# Altium PCB МПСУ.464342.21-005 T5M.PcbDoc
Units mm, origin at the board's own origin, x right, y up, seen from the top; angles counter-clockwise.
Board outline 152.4 x 101.6 mm, 2 copper layers (Top Layer, Bottom Layer); 66 components, 50 nets, 238 pads, 0 vias.
Unrouted connection lines stored in the file: 182.
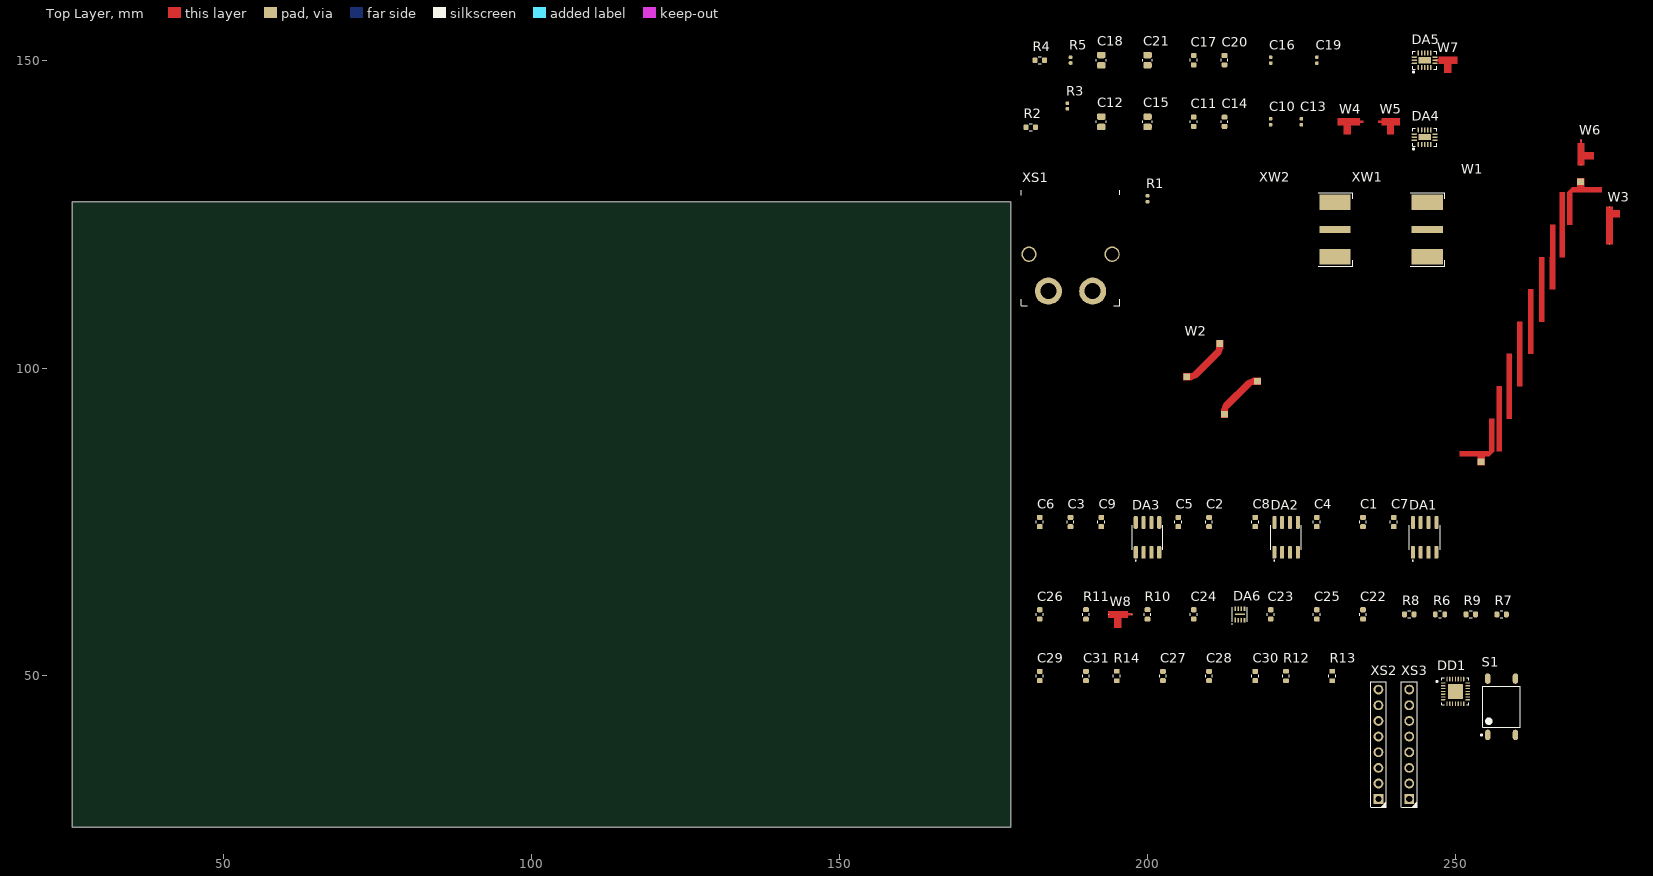
[diagram p0: Top Layer view]
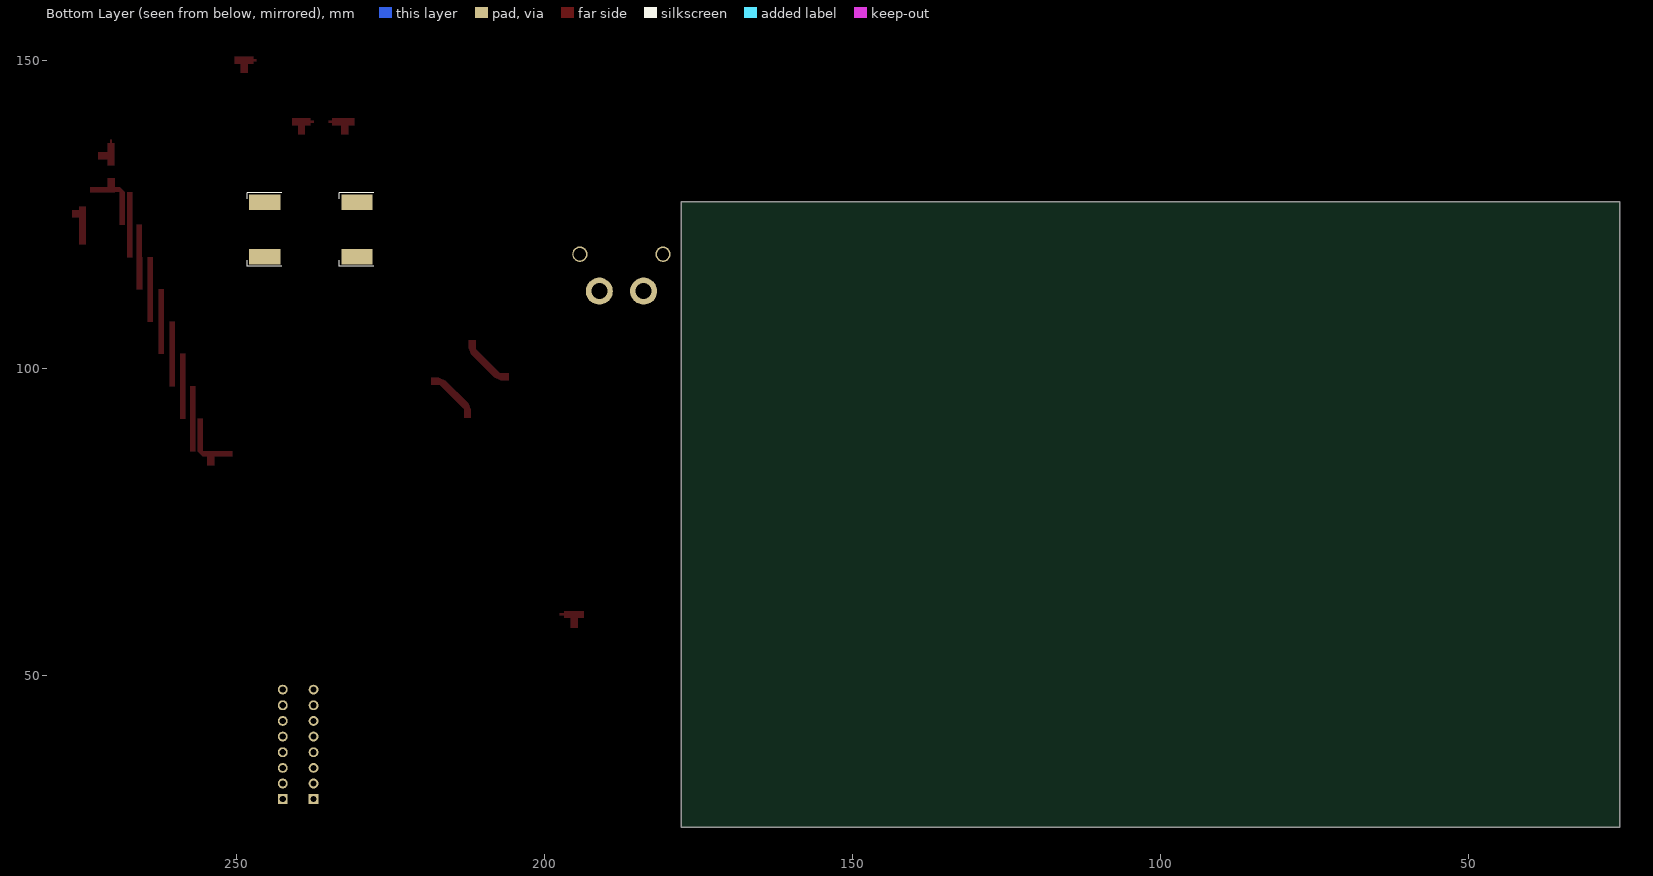
[diagram p1: Bottom Layer view, seen from below]

## Layer stack, top to bottom
Top Solder: solder mask 0.0102, Solder Resist, Dk 3.5
Top Layer: signal copper 0.0356
Dielectric 1: dielectric 0.32, FR-4, Dk 4.8
Bottom Layer: signal copper 0.0356
Bottom Solder: solder mask 0.0102, Solder Resist, Dk 3.5

## Board outline
25.4,25.4 177.8,25.4 177.8,127 25.4,127

## Design rules (kind name [scope] priority, off if disabled: settings)
AcuteAngle [All] p1: minimum=6.00000000000000E+0001 checktracksonly=FALSE
BoardOutlineClearance [OnCopper] p1: gap=0.25 ignorepadtopadclearanceinfootprint=FALSE except(0: Poly-OutlineEdge)
Clearance [All] p1: gap=0.15 ignorepadtopadclearanceinfootprint=FALSE
ComponentClearance ComponentClearance_Matching [InComponentClass('RF') vs InComponentClass('RFDevices')] p1: gap=-3 collisioncheckmode=3 verticalgap=-2 showdistances=FALSE
ComponentClearance [All] p2: gap=0.2 collisioncheckmode=3 verticalgap=2540 showdistances=TRUE
HoleSize [All] p1: absolutevalues=TRUE maxlimit=3.5 minlimit=0.4 maxpercent=80.000 minpercent=20.000
HoleToHoleClearance [All] p1: gap=0.2 allowstackedmicrovias=FALSE
MinimumAnnularRing MinimumAnnularRingVIA [IsVia] p1: minimumring=0.15
MinimumAnnularRing MinimumAnnularRingPAD [IsPad] p2: minimumring=0.2
MinimumSolderMaskSliver [All] p1: minsoldermaskwidth=0.15
PermittedLayers [All] p1: toplayerpermitted=TRUE bottomlayerpermitted=FALSE
PolygonConnect PolygonConnectMH [HasFootprint('MH_M3')] p1: connectstyle=Relief reliefconductorwidth=0.3 reliefentries=4 polygonreliefangle="90 Angle" airgapwidth=0.5
PolygonConnect PolygonConnectFilterGND [IsPad and InComponent('W1') and InNet('GND')] p2: connectstyle=Direct reliefconductorwidth=0.254 reliefentries=4 polygonreliefangle="90 Angle" airgapwidth=0.254
PolygonConnect PolygonConnectRFConns [InComponentClass('RFConn') and InNet('GND')] p3: connectstyle=Direct reliefconductorwidth=0.254 reliefentries=4 polygonreliefangle="90 Angle" airgapwidth=0.254
PolygonConnect PolygonConnectGNDVia [IsVia and InNet('GND')] p4: connectstyle=Direct reliefconductorwidth=0.254 reliefentries=4 polygonreliefangle="90 Angle" airgapwidth=0.254
PolygonConnect PolygonConnectRF [InNet('GND') and InComponentClass('RF')] p5: connectstyle=Relief reliefconductorwidth=0.2 reliefentries=4 polygonreliefangle="90 Angle" airgapwidth=0.2
PolygonConnect [All] p6: connectstyle=Relief reliefconductorwidth=0.2 reliefentries=4 polygonreliefangle="90 Angle" airgapwidth=0.2
RoutingLayers RoutingLayersRF [InNetClass('50Ohm')] p1: top layer_v5=TRUE bottom layer_v5=FALSE
RoutingLayers [All] p2: top layer_v5=TRUE bottom layer_v5=TRUE
RoutingVias [All] p1: holewidth=0.4 width=0.8 viastyle="Through Hole" minholewidth=0.4 minwidth=0.8 maxholewidth=0.4 maxwidth=0.8
SilkToSilkClearance [All] p1: silktosilkclearance=0.15
SilkToSolderMaskClearance [IsPad] p1: minsilkscreentomaskgap=0.15 clearancetoexposedcopper=TRUE
SolderMaskExpansion SolderMaskExpansionGNDVia [IsVia and InNet('GND')] p1: expansion=0.102 istentingtop=TRUE
SolderMaskExpansion [All] p2: expansion=0.05 istentingtop=FALSE
UnConnectedPin [All] p1:
Width WidthRF [InNetClass('50Ohm')] p1: maxlimit=1.15 minlimit=1.05 preferedwidth=1.1 minimp=50.000000 maximp=50.000000 favimp=50.000000
Width [All] p2: maxlimit=0.5 minlimit=0.2 preferedwidth=0.3
23 further rules are at their usual default settings.

## Classes and differential pairs
component class RFDevices: DA4 DA5 DA6
component class RF: W3 W4 W5 W6 W7 W8
channel class "МПСУ.464342.21-005 Э3 Лист2": LNA1 LNA2
net class 50Ohm: LNA_RF_IN_LNA1 LNA_RF_IN_LNA2 LNA_RF_OUT_LNA1 LNA_RF_OUT_LNA2 LTC_RF_IN NetR1_2 NetW2_2 NetW3_2
component class "МПСУ.464342.21-005 Э3 Лист8": R1 W1 W2 W3 XS1 XW1 XW2
component class PowerManagment: C1 C2 C3 C4 C5 C6 C7 C8 C9 DA1 DA2 DA3
component class PowerDetector: C22 C23 C24 C25 C26 DA6 R6 R7 R8 R9 R10 R11 W8
component class Microcontroller: C27 C28 C29 C30 C31 DD1 R12 R13 R14 S1 XS2 XS3
component class LNA2: C16 C17 C18 C19 C20 C21 DA5 R4 R5 W6 W7
component class LNA1: C10 C11 C12 C13 C14 C15 DA4 R2 R3 W4 W5

## Components (designator, comment, footprint, x,y, rotation, side; value= is the part's Value field where it differs from the comment)
C1 "1 uF" CAPC160X80X90L30N 235,75 r90 top value="100 pF"
C2 "1 uF" CAPC160X80X90L30N 210,75 r90 top value="100 pF"
C3 "1 uF" CAPC160X80X90L30N 187.5,75 r90 top value="100 pF"
C4 "10 pF" CAPC160X80X90L30N 227.5,75 r90 top value="100 pF"
C5 "10 pF" CAPC160X80X90L30N 205,75 r90 top value="100 pF"
C6 "10 pF" CAPC160X80X90L30N 182.5,75 r90 top value="100 pF"
C7 "10 uF" CAPC160X80X90L30N 240,75 r90 top value="100 pF"
C8 "10 uF" CAPC160X80X90L30N 217.5,75 r90 top value="100 pF"
C9 "10 uF" CAPC160X80X90L30N 192.5,75 r90 top value="100 pF"
C10 "100 pF" CAPC100X50X55L20N 220,140 r90 top
C11 "1 uF" CAPC160X80X90L30N 207.5,140 r90 top value="100 pF"
C12 "0.33 uF" CAPC200X125X95L50N 192.5,140 r90 top value="100 pF"
C13 "100 pF" CAPC100X50X55L20N 225,140 r90 top
C14 "1 uF" CAPC160X80X90L30N 212.5,140 r90 top value="100 pF"
C15 "0.33 uF" CAPC200X125X95L50N 200,140 r90 top value="100 pF"
C16 "100 pF" CAPC100X50X55L20N 220,150 r90 top (schematic designator C10)
C17 "1 uF" CAPC160X80X90L30N 207.5,150 r90 top value="100 pF" (schematic designator C11)
C18 "0.33 uF" CAPC200X125X95L50N 192.5,150 r90 top value="100 pF" (schematic designator C12)
C19 "100 pF" CAPC100X50X55L20N 227.5,150 r90 top (schematic designator C13)
C20 "1 uF" CAPC160X80X90L30N 212.5,150 r90 top value="100 pF" (schematic designator C14)
C21 "0.33 uF" CAPC200X125X95L50N 200,150 r90 top value="100 pF" (schematic designator C15)
C22 "10 pF" CAPC160X80X90L30N 235,60 r90 top value="100 pF" (schematic designator C16)
C23 "OPT" CAPC160X80X90L30N 220,60 r90 top value="100 pF" (schematic designator C17)
C24 "10 nF" CAPC160X80X90L30N 207.5,60 r90 top value="100 pF" (schematic designator C18)
C25 "100 nF" CAPC160X80X90L30N 227.5,60 r90 top value="100 pF" (schematic designator C19)
C26 "1 uF" CAPC160X80X90L30N 182.5,60 r90 top value="100 pF" (schematic designator C20)
C27 "OPT" CAPC160X80X90L30N 202.5,50 r90 top value="100 pF" (schematic designator C21)
C28 "OPT" CAPC160X80X90L30N 210,50 r90 top value="100 pF" (schematic designator C22)
C29 "OPT" CAPC160X80X90L30N 182.5,50 r90 top value="100 pF" (schematic designator C23)
C30 "100 nF" CAPC160X80X90L30N 217.5,50 r90 top value="100 pF" (schematic designator C24)
C31 "100 nF" CAPC160X80X90L30N 190,50 r90 top value="100 pF" (schematic designator C25)
DA1 "LT1763-1.5" SOIC8P127_490X600X175L83X41N 245,72.5 r0 top
DA2 "LT1763-2.5" SOIC8P127_490X600X175L83X41N 222.5,72.5 r0 top
DA3 "LT1763-3.3" SOIC8P127_490X600X175L83X41N 200,72.5 r0 top
DA4 "PMA-183PLN+" JV2579 245,137.5 r0 top
DA5 "PMA-183PLN+" JV2579 245,150 r0 top (schematic designator DA4)
DA6 "LTC5597" LTC5597 215,60 r0 top (schematic designator DA5)
DD1 "" QFN127P600-8N 250,47.5 r0 top
R1 "50 Ohm" RESC100X50X40L25N 200,127.5 r90 top value=10
R2 "10 Ohm" RESC160X80X60L30N 181.045,139.1 r0 top value=10
R3 "180 Ohm" RESC100X50X40L25N 187,142.56 r90 top value=10
R4 "10 Ohm" RESC160X80X60L30N 182.5,150 r0 top value=10 (schematic designator R2)
R5 "180 Ohm" RESC100X50X40L25N 187.5,150 r90 top value=10 (schematic designator R3)
R6 "OPT" RESC160X80X60L30N 247.5,60 r0 top value=10 (schematic designator R4)
R7 "2 kOhm" RESC160X80X60L30N 257.5,60 r0 top value=10 (schematic designator R5)
R8 "3 k" RESC160X80X60L30N 242.5,60 r0 top value=10 (schematic designator R6)
R9 "1 Ohm" RESC160X80X60L30N 252.5,60 r0 top value=10 (schematic designator R7)
R10 "100 Ohm" RESC160X80X60L30N 200,60 r90 top value=10 (schematic designator R8)
R11 "OPT" RESC160X80X60L30N 190,60 r90 top value=10 (schematic designator R9)
R12 "1 Ohm" RESC160X80X60L30N 222.5,50 r90 top value=10 (schematic designator R10)
R13 "1 Ohm" RESC160X80X60L30N 230,50 r90 top value=10 (schematic designator R11)
R14 "1 Ohm" RESC160X80X60L30N 195,50 r90 top value=10 (schematic designator R12)
S1 "L-KLS7-TS6604-4.3-180-B" DIP2_SOIC450P1000X350-4N 257.5,45 r90 top
W1 "Filter" MFilter8_5G 254.179,84.25 r90 top
W2 "Colinear Coupler" CLCoupler 217.875,97.875 r180 top
W3 "Matching" MATCHING_MAIN_OUT 275.025,120.1 r90 top net-tie
W4 "Matching" MATCHING_LNA_IN 235,140 r0 top net-tie
W5 "Matching" MATCHING_LNA_OUT 237.5,140 r0 top net-tie
W6 "Matching" MATCHING_LNA_IN 270.4,137.05 r90 top net-tie (schematic designator W4)
W7 "Matching" MATCHING_LNA_OUT 246.8,150 r0 top net-tie (schematic designator W5)
W8 "Matching" MATCHING_LTC_IN 197.5,60 r0 top net-tie (schematic designator W6)
XS1 "XT-60-PW-F" XT-60-PW-F 187.5,112.5 r0 top
XS2 "PBS-8" RHDRV8W64P254_8X1_2082X250H850 237.5,30 r90 top
XS3 "PBS-8" RHDRV8W64P254_8X1_2082X250H850 242.5,30 r90 top
XW1 "MOLEX 73251-1153" "MOLEX 73251-1153 - 1.1pin" 242.5,122.5 r0 top
XW2 "MOLEX 73251-1153" "MOLEX 73251-1153 - 1.1pin" 227.5,122.5 r0 top

## Footprints (in the part's own frame and the unit in brackets; to place one, negate y for a bottom-side part, rotate by r counter-clockwise, add the part's x,y. Pads: shape width x height; smd on the part's side, far side on the other; paste and mask are expansions set on the pad)
CAPC100X50X55L20N [mm] "Capacitor, Chip; 1.00 mm L X 0.50 mm W X 0.55 mm H body"
  rrect49% 0.53x0.58 smd: 1(-0.485,0) 2(0.485,0)
  body extent -0.5,-0.25 0.5,0.25, height 0.55
CAPC160X80X90L30N [mm] "Capacitor, Chip; 1.60 mm L X 0.80 mm W X 0.90 mm H body"
  rrect51% 0.82x0.93 smd: 1(-0.755,0) 2(0.755,0)
  silkscreen extent -0.2,-0.55 0.2,0.55, body extent -0.8,-0.4 0.8,0.4, height 0.9
CAPC200X125X95L50N [mm] "Capacitor, Chip; 2.00 mm L X 1.25 mm W X 0.95 mm H body"
  rrect48% 1.05x1.38 smd: 1(-0.84,0) 2(0.84,0)
  silkscreen extent -0.17,-0.78 0.17,0.78, body extent -1,-0.63 1,0.63, height 0.95
CLCoupler [mm] "Coupler 40 dB, diel RO4003 0.5 oz ED 20 mil"
  rect 1.1x1.1 smd paste-0.55 mask-0.55: 1(0,0) 2(5.375,5.375) 3(11.5,-0.725) 4(6.125,-6.1)
  Top Layer region: -0.55,-0.55 -0.55,0.55 0.875,0.549 0.987,0.67 4.713,4.397 4.825,4.5 4.825,5.925 5.925,5.925 5.925,4.675 5.491,3.619 1.765,-0.108 0.7,-0.55
  Top Layer region: 5.575,-6.65 5.575,-5.42 6.007,-4.35 9.725,-0.625 10.8,-0.175 12.05,-0.175 12.05,-1.275 10.65,-1.275 10.525,-1.4 6.785,-5.128 6.675,-5.25 6.675,-6.65
DIP2_SOIC450P1000X350-4N [mm] "SOIP=C, 4-Leads, Body 6,00x6,00mm, Pitch 4,50mm, IPC Medium Density"
  oval 1.7x0.9 smd: 1(-4.575,2.25) 2(-4.575,-2.25) 3(4.575,-2.25) 4(4.575,2.25)
  silkscreen extent -4.7,-3.05 3.32,3.37, body extent -4.5,-3 4.5,3, height 7.17
JV2579 [mm] "QFN, 17-Leads, Body   2.5x3.5mm, Pitch 0.51mm, Thermal Pad 2x1mm, IPC Medium Density"
  oval 0.25x0.85 smd: 1(-1,-1.175) 2(-0.5,-1.175) 3(0,-1.175) 4(0.5,-1.175) 5(1,-1.175) 9(1,1.175) 10(0.5,1.175) 11(0,1.175) 12(-0.5,1.175) 13(-1,1.175)
  oval 0.85x0.25 smd: 6(1.675,-0.5) 7(1.675,0) 8(1.675,0.5) 14(-1.675,0.5) 15(-1.675,0) 16(-1.675,-0.5)
  rect 2x1 smd: 17(0,0)
  silkscreen extent -1.95,-2.02 1.95,1.45, body extent -1.8,-1.3 1.8,1.3, height 0.85
LTC5597 [mm] "DFN 8-Leads, Body 2,00x2,00mm, Pitch 0,50mm, Thermal Pad 1,60x0,25mm, IPC Medium Density"
  rect 0.25x0.8 smd: 1(-0.75,-0.875)
  rect 0.25x0.7 smd: 2(-0.25,-0.925) 3(0.25,-0.925) 4(0.75,-0.925) 5(0.75,0.925) 6(0.25,0.925) 7(-0.25,0.925) 8(-0.75,0.925)
  rect 1.6x0.25 smd: 9(0,0)
  silkscreen extent -1.3,-1.62 1.2,1.2, body extent -1.05,-1.1 1.05,1.1, height 0.8
MATCHING_LNA_IN [mm]
  rect 0.1x0.1 smd paste-0.05 mask-0.05: 1(-4.05,0) 2(0,0)
  Top Layer region: -3.1,-2.05 -3.1,-0.55 -4.1,-0.55 -4.1,0.55 -0.5,0.55 -0.5,0.15 0,0.15 0,-0.15 -0.5,-0.15 -0.5,-0.55 -2,-0.55 -2,-2.05
MATCHING_LNA_OUT [mm]
  rect 0.1x0.1 smd paste-0.05 mask-0.05: 1(0,0) 2(3.45,0)
  Top Layer region: 0.5,-0.55 0.5,-0.15 0,-0.15 0,0.15 0.5,0.15 0.5,0.55 3.5,0.55 3.5,-0.55 2.5,-0.55 2.5,-2.05 1.4,-2.05 1.4,-0.55
MATCHING_LTC_IN [mm]
  rect 0.1x0.1 smd paste-0.05 mask-0.05: 1(-3.85,0) 2(0,0)
  Top Layer region: -2.9,-2.15 -2.9,-0.55 -3.9,-0.55 -3.9,0.55 -0.7,0.55 -0.7,0.15 0,0.15 0,-0.15 -0.7,-0.15 -0.7,-0.55 -1.8,-0.55 -1.8,-2.15
MATCHING_MAIN_OUT [mm]
  rect 0.1x0.1 smd paste-0.05 mask-0.05: 1(0.05,0) 2(6.05,0)
  Top Layer region: 0,-0.55 0,0.55 6.1,0.55 6.1,-0.55 5.5,-0.55 5.5,-1.65 4.4,-1.65 4.4,-0.55
MFilter8_5G [mm] "Bandpass filter, Fc 8.50GHz, BW  500 MHz, type - Coupled Microstrip Filter, diel RO4003 0.5 oz ED 20 mil"
  rect 1.1x1.1 smd paste-0.55 mask-0.55: 1(0.55,0) 2(46.025,-16.146)
  Top Layer region: 0,-0.577 0,0.577 1.432,0.577 1.432,3.476 2.279,3.476 2.279,-1.352 7.555,-1.352 7.555,-2.146 2.253,-2.146 1.432,-1.352 1.432,-0.577
  Top Layer region: 2.253,-3.36 2.253,-2.566 12.8,-2.566 12.8,-3.36
  Top Layer region: 7.555,-4.962 18.045,-4.964 18.045,-4.14 7.555,-4.142
  Top Layer region: 12.8,-6.7 12.8,-5.877 18.045,-5.877 18.045,-5.876 23.293,-5.876 23.293,-6.7 18.045,-6.7 18.045,-6.7
  Top Layer region: 18.045,-8.485 18.045,-7.661 23.293,-7.661 28.541,-7.661 28.541,-8.485 23.293,-8.485
  Top Layer region: 23.293,-10.27 28.541,-10.27 28.541,-10.269 33.786,-10.269 33.786,-9.446 28.541,-9.446 28.541,-9.446 23.293,-9.446
  Top Layer region: 28.541,-12.006 33.786,-12.006 33.786,-12.004 39.031,-12.004 39.031,-11.184 33.786,-11.184 33.786,-11.182 28.541,-11.182
  Top Layer region: 33.786,-13.581 33.786,-12.786 44.333,-12.786 44.333,-13.581
  Top Layer region: 44.307,-15.568 44.307,-14.794 39.031,-14.794 39.031,-14 44.333,-14 45.154,-14.794 45.154,-15.569 46.586,-15.569 46.586,-16.723 45.154,-16.723 45.154,-19.622 44.307,-19.622
"MOLEX 73251-1153 - 1.1pin" [mm] "MOLEX 50 Ohms, SMA Jack Receptacle, Edge Mount, .25µm Gold (Au) Plating"
  rect 5.1x1.1 smd: 1(2.95,0)
  rect 5.1x2.5 smd: 2(2.95,-4.4) 2(2.95,4.4)
  rect 5.1x2.5 smd far side: 2(2.95,-4.4) 2(2.95,4.4)
  silkscreen extent 0.2,-6 5.8,6, body extent -9.5,-4.76 4.77,4.76, height 4.36
QFN127P600-8N [mm] "28-Lead Very Thin Plastic Quad Flat, No Lead Package (RNB) - 4x4x1 mm Body [VQFN] With 2.40mm Exposed Pad; Atmel Legacy GPC ZBV"
  oval 0.75x0.2 smd: 1(-2,1.35) 2(-2,0.9) 3(-2,0.45) 4(-2,0) 5(-2,-0.45) 6(-2,-0.9) 7(-2,-1.35) 15(2,-1.35) 16(2,-0.9) 17(2,-0.45) 18(2,0) 19(2,0.45) 20(2,0.9) 21(2,1.35)
  oval 0.2x0.75 smd: 8(-1.35,-2) 9(-0.9,-2) 10(-0.45,-2) 11(0,-2) 12(0.45,-2) 13(0.9,-2) 14(1.35,-2) 22(1.35,2) 23(0.9,2) 24(0.45,2) 25(0,2) 26(-0.45,2) 27(-0.9,2) 28(-1.35,2)
  rect 2.4x2.4 smd: 29(0,0)
  silkscreen extent -3.12,-2.2 2.2,2.2, body extent -2.05,-2.05 2.05,2.05, height 1
RESC100X50X40L25N [mm] "Resistor, Chip; 1.00 mm L X 0.50 mm W X 0.40 mm H body"
  rrect52% 0.58x0.58 smd: 1(-0.46,0) 2(0.46,0)
  body extent -0.5,-0.25 0.5,0.25, height 0.4
RESC160X80X60L30N [mm] "Resistor, Chip; 1.60 mm L X 0.80 mm W X 0.60 mm H body"
  rrect51% 0.79x0.93 smd: 1(-0.77,0) 2(0.77,0)
  silkscreen extent -0.23,-0.56 0.23,0.56, body extent -0.8,-0.4 0.8,0.4, height 0.6
RHDRV8W64P254_8X1_2082X250H850 [mm] "Header, Vertical, 2.54 mm pitch; 0.64 mm lead width, 8 pins, 1 rows, 8 pins per row, 20.82 mm L X 2.5 mm W X 8.5 mm H body"
  rect 1.6x1.6 hole 1 paste-1.6: 1(0,0)
  round 1.6 hole 1 paste-1.6: 2(2.54,0) 3(5.08,0) 4(7.62,0) 5(10.16,0) 6(12.7,0) 7(15.24,0) 8(17.78,0)
  silkscreen extent -1.28,-1.28 19.06,1.28, body extent -1.52,-1.25 19.3,1.25, height 8.5
SOIC8P127_490X600X175L83X41N [mm] "Small Outline IC (SOIC), 1.27 mm pitch; 8 pin, 4.90 mm L X 3.90 mm W X 1.75 mm H body"
  rrect52% 0.66x2.07 smd: 1(-1.905,-2.425) 2(-0.635,-2.425) 3(0.635,-2.425) 4(1.905,-2.425) 5(1.905,2.425) 6(0.635,2.425) 7(-0.635,2.425) 8(-1.905,2.425)
  silkscreen extent -2.5,-3.83 2.5,2, body extent -2.45,-3 2.45,3, height 1.75
XT-60-PW-F [mm]
  round 4.4 hole 2.6: 1(-3.6,0) 2(3.6,0)
  round 2.5 hole 2: 3(-6.75,6) 3(6.75,6)
  silkscreen extent -8,-2.35 8,16.35, body extent -7.75,-1.85 7.75,15.35, height 8.4

## Part data
C1 C2 C3 C4 C5 C6 C7 C8 C9 C10 C11 C12 C13 C14 C15 C16 C17 C18 C19 C20 C21 C22 C23 C24 C25 C26 C27 C28 C29 C30 C31: library part Capacitor, "Capacitor, generic", Package=0402
DA1 DA2 DA3: library part LT1763, "Micropower DC/DC Converters in SOIC8", Manufacturer="Analog Devices"
DA4 DA5: "SMT Low Noise Amplifier, 6000 - 18000 MHz, 50Ω", Manufacturer=Mini-Circuits, ComponentLink1Description=ProductPage, ComponentLink1URL=https://www.minicircuits.com/WebStore/dashboard.html?model=PMA-183PLN%2B, PartNumber=PMA-183PLN+
DA6: "100MHz to 70GHz Linear-in-dB RMS Power Detector with 35dB Dynamic Range", Manufacturer="Analog Devices", ComponentLink1Description="Product Page", ComponentLink1URL=https://www.analog.com/en/products/ltc5597.html#product-overview, PartNumber=LTC5597
DD1: library part ATmega328, "Low  power,  CMOS  8-bit  microcontrollers  based  on  the / AVR ® enhanced RISC architecture"
R1 R2 R3 R4 R5 R6 R7 R8 R9 R10 R11 R12 R13 R14: library part Resistor, "Resistor, generic", Package=0402
S1: library part KLS7-TS6601-7, "Tact Switch", Manufacturer="KLS electronic co ltd", ComponentLink1Description=DataSheet, ComponentLink1URL=https://static.chipdip.ru/lib/551/DOC001551970.pdf, PartNumber=L-KLS7-TS6604-4.3-180-B
W1: library part "Filter 8.5G", "Bandpass filter, Fc 8.50GHz, BW  500 MHz, type - Coupled Microstrip Filter, diel RO4003 0.5 oz ED 20 mil"
W2: library part CLCoupler, "Coupler 40 dB, diel RO4003 0.5 oz ED 20 mil"
W3 W8: library part Matching_1
W4 W5 W6 W7: library part Matching_1, "Matching MTEE"
XS1: "Header, Right-angle, 2x1", Manufactorer="Changzhou Amass Electronics CO.LTD.", Category=Connector, ComponentLink1Description=DataSheet, ComponentLink1URL=https://www.tme.eu/ru/Document/9b8d0c5eb7094295f3d3112c214d3ade/XT60PW%20SPEC.pdf, Net1=1, Net2=2, PartNumber=XT-60-PW-F
XS2 XS3: "Header, Vertical Receptacle, 2.54 mm pitch 1x8", PartNumber=PBS-8
XW1 XW2: "MOLEX 73251-1153 (SMA EDGE)", Manufacturer=Molex, PartNumber="MOLEX 73251-1153"

## Nets (pads, with @x,y where several pads share a name; then routed paths per layer and width w, separated by ;. In a path a pad name is that pad's centre, name@x,y a point inside that pad or via, vN(x,y) a via of type N, cw(c..) or ccw(c..) an arc to the next point about the centre after c; other vN are vias at no path point)
+1.5V: C4.1 C7.2 C31.2 DA1.1 DA1.2 R14.2
+2.5V: C5.1 C8.2 DA2.1 DA2.2 R2.1 R4.1
+3.3V: C6.1 C9.2 C25.2 C30.2 DA3.1 DA3.2 R9.2 R13.2
DC_IN: C1.2 C2.2 C3.2 DA1.5 DA1.8 DA2.5 DA2.8 DA3.5 DA3.8 XS1.1
EN: DD1.9 R6.2 R7.1
GND: C1.1 C2.1 C3.1 C7.1 C8.1 C9.1 C10.1 C11.1 C12.1 C13.2 C14.2 C15.2 C16.1 C17.1 C18.1 C19.2 C20.2 C21.2 C22.1 C23.1 C25.1 C26.1 C27.1 C28.1 C29.1 C30.1 C31.1 DA1.3 DA1.6 DA1.7 DA2.3 DA2.6 DA2.7 DA3.3 DA3.6 DA3.7 DA4.1 DA4.3 DA4.5 DA4.6 DA4.8 DA4.9 DA4.10 DA4.11 DA4.12 DA4.13 DA4.14 DA4.16 DA4.17 DA5.1 DA5.3 DA5.5 DA5.6 DA5.8 DA5.9 DA5.10 DA5.11 DA5.12 DA5.13 DA5.14 DA5.16 DA5.17 DA6.4 DA6.5 DA6.7 DA6.9 DD1.4 DD1.18 R1.1 R6.1 R8.1 R11.1 XS1.2 XS1.3 XS2.8 XW1.2 XW2.2
LNA_RF_IN_LNA1: W4.1 XW1.1
LNA_RF_IN_LNA2: W1.2 W6.1
LNA_RF_OUT_LNA1: W1.1 W5.2
LNA_RF_OUT_LNA2: W2.1 W7.2
LTC_RF_IN: W2.4 W8.1
NetC4_2: C4.2 DA1.4
NetC5_2: C5.2 DA2.4
NetC6_2: C6.2 DA3.4
NetC10_2: C10.2 C11.2 C12.2 DA4.2 R2.2 R3.1
NetC13_1: C13.1 C14.1 C15.1 DA4.4 R3.2
NetC16_2: C16.2 C17.2 C18.2 DA5.2 R4.2 R5.1
NetC19_1: C19.1 C20.1 C21.1 DA5.4 R5.2
NetC22_2: C22.2 DA6.8 R7.2 R8.2
NetC23_2: C23.2 DA6.1 R9.1
NetC24_1: C24.1 DA6.3
NetC24_2: C24.2 DA6.2 R10.1
NetC26_2: C26.2 DD1.19 R10.2 R11.2
NetC29_2: C29.2 DD1.17 R14.1
NetDA4_7: DA4.7 W4.2
NetDA4_15: DA4.15 W5.1
NetDA5_7: DA5.7 W6.2
NetDA5_15: DA5.15 W7.1
NetDA6_6: DA6.6 W8.2
NetDD1_1: DD1.1 XS2.4
NetDD1_2: DD1.2 XS2.5
NetDD1_5: DD1.5 XS3.7
NetDD1_6: DD1.6 XS3.8
NetDD1_7: DD1.7 XS2.6
NetDD1_8: DD1.8 XS2.7
NetDD1_10: DD1.10 XS3.1
NetDD1_11: DD1.11 XS3.2
NetDD1_12: DD1.12 XS3.3
NetDD1_13: DD1.13 XS3.4
NetDD1_14: DD1.14 XS3.5
NetDD1_15: DD1.15 XS3.6
NetDD1_16: DD1.16 R12.1
NetDD1_25: DD1.25 S1.4
NetDD1_26: DD1.26 XS2.1
NetDD1_27: DD1.27 XS2.2
NetDD1_28: DD1.28 XS2.3
NetR1_2: R1.2 W2.3
NetW2_2: W2.2 W3.1
NetW3_2: W3.2 XW2.1
VCC: C27.2 C28.2 DD1.3 R12.2 R13.1 S1.1 S1.2 S1.3
pads on no net: DD1.20 DD1.21 DD1.22 DD1.23 DD1.24 DD1.29